# Altium PCB Силовая плата.PcbDoc (part 2 of 2)
Units mm, origin at the board's own origin, x right, y up, seen from the top; angles counter-clockwise.
Board outline 67 x 90.45 mm, 6 copper layers (F.Cu, In1.Cu, In2.Cu, In3.Cu, In4.Cu, B.Cu); 79 components, 15 nets, 212 pads, 347 vias.
Unrouted connection lines stored in the file: 1.
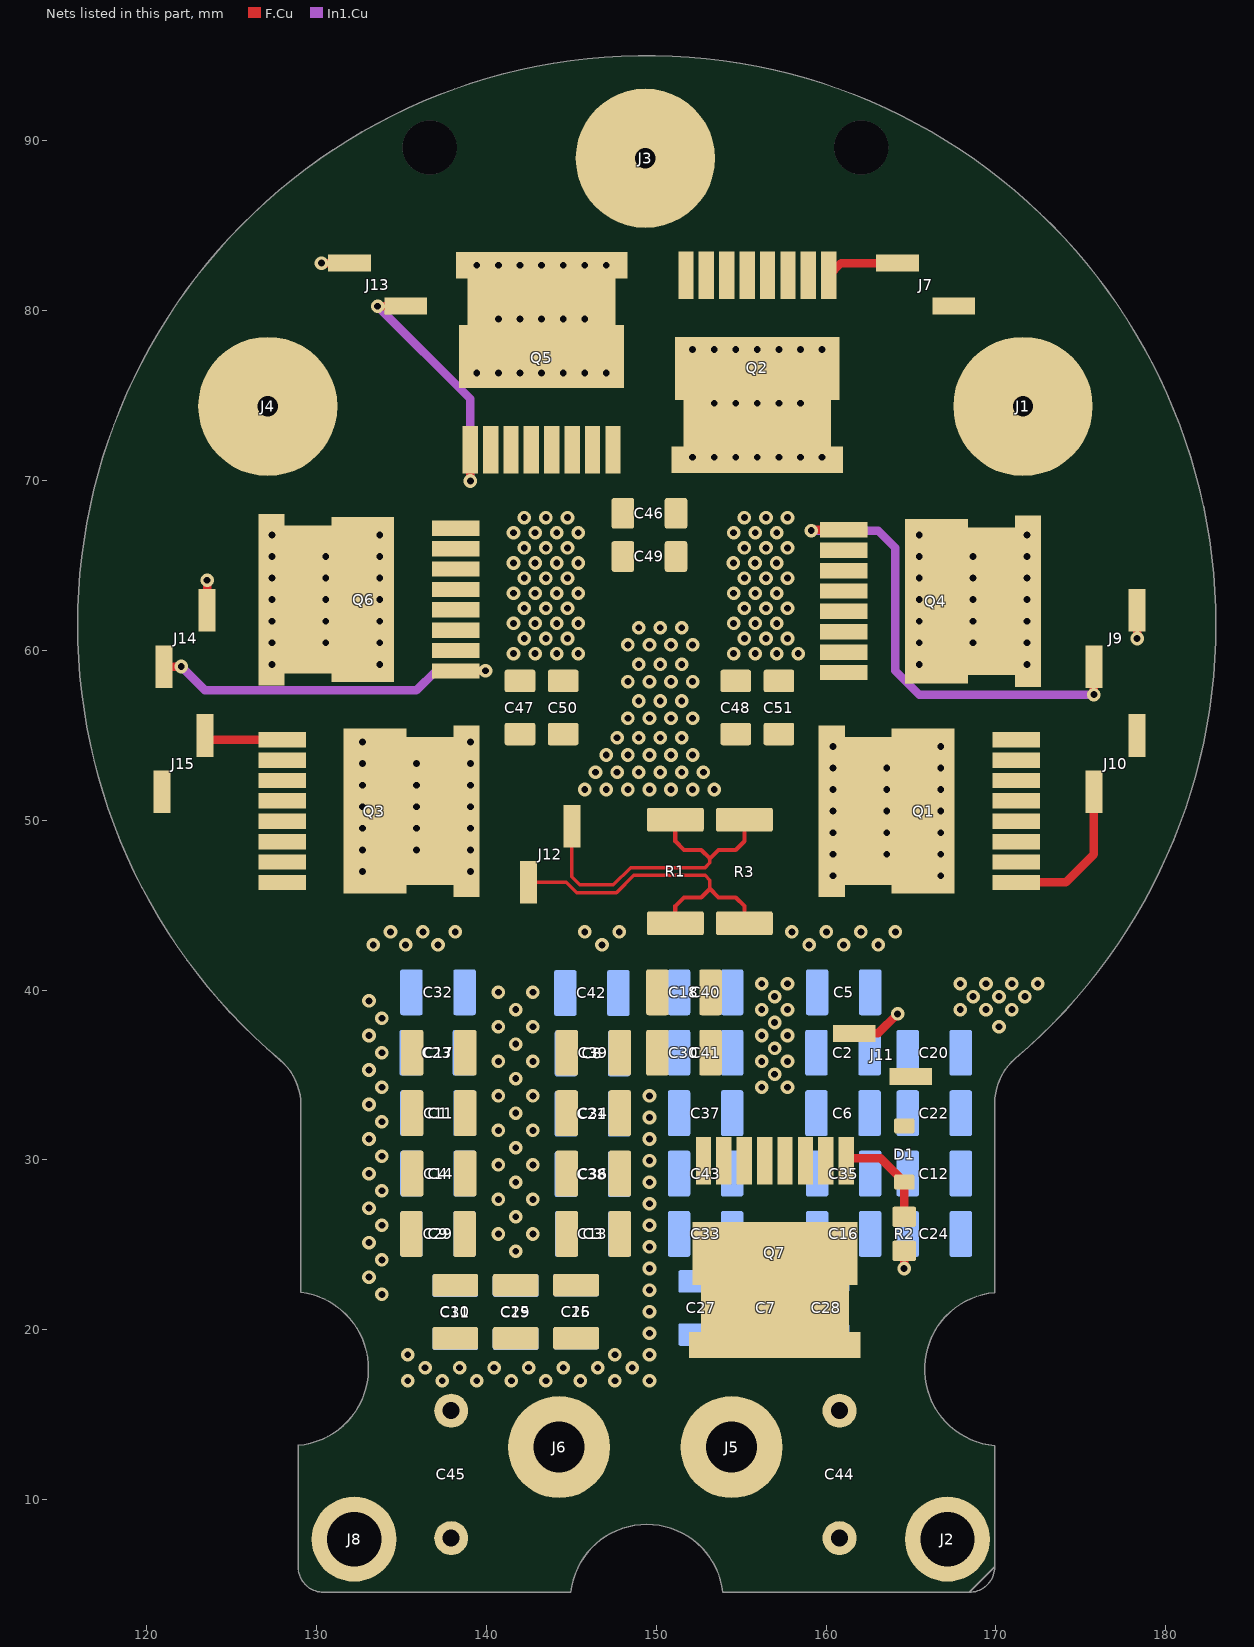
[diagram p6: the nets of this part, all layers, seen from the top]

## Via types
v1: diameter 0.8, hole 0.4, F.Cu to B.Cu, tented both sides, 347 vias

## Nets (pads, with @x,y where several pads share a name; then routed paths per layer and width w, separated by ;. In a path a pad name is that pad's centre, name@x,y a point inside that pad or via, vN(x,y) a via of type N, cw(c..) or ccw(c..) an arc to the next point about the centre after c; other vN are vias at no path point)
A: J1.1 J10.1 Q1.2 Q4.3
  other v1: 165.481,59.171 171.831,59.171 165.481,60.441 168.656,60.441 171.831,60.441 165.481,61.711 168.656,61.711 171.831,61.711 165.481,62.981 168.656,62.981 171.831,62.981 165.481,64.251 168.656,64.251 171.831,64.251 165.481,65.521 168.656,65.521 171.831,65.521 165.481,66.791 171.831,66.791
B: J3.1 J7.1 Q2.2 Q5.3
  other v1: 139.446,76.316 140.716,76.316 141.986,76.316 143.256,76.316 144.526,76.316 145.796,76.316 147.066,76.316 140.716,79.491 141.986,79.491 143.256,79.491 144.526,79.491 145.796,79.491 139.446,82.666 140.716,82.666 141.986,82.666 143.256,82.666 144.526,82.666 145.796,82.666 147.066,82.666
C: J4.1 J15.2 Q3.2 Q6.3
  other v1: 127.381,59.171 133.731,59.171 127.381,60.441 130.556,60.441 133.731,60.441 127.381,61.711 130.556,61.711 133.731,61.711 127.381,62.981 130.556,62.981 133.731,62.981 127.381,64.251 130.556,64.251 133.731,64.251 127.381,65.521 130.556,65.521 133.731,65.521 127.381,66.791 133.731,66.791
Earth_Protective: C44.1 C45.2 J2.1 J8.1
G1: J10.2 Q1.1 | length 8.9
  F.Cu w0.5: Q1.1@171.191,46.335 174.108,46.335 175.768,47.995 J10.2@175.768,51.674
G2: J9.2 Q4.1 | length 28.4
  F.Cu w0.5: v1(159.131,67.045) 159.175,67.089 Q4.1@161.036,67.089 ; v1(175.768,57.393) J9.2@175.768,59.04
  In1.Cu w0.5: v1(159.131,67.045) 163.068,67.045 164.084,66.029 164.084,58.79 165.481,57.393 v1(175.768,57.393)
G3: J7.2 Q2.1 | length 4.4
  F.Cu w0.5: Q2.1@160.156,82.063 160.885,82.793 J7.2@164.207,82.793
G4: J13.1 Q5.1 | length 16
  F.Cu w0.5: v1(133.604,80.253) J13.1@135.259,80.253 ; Q5.1@139.056,71.807 139.056,69.975 v1(139.065,69.966)
  In1.Cu w0.5: v1(133.604,80.253) 139.065,74.792 v1(139.065,69.966)
G5: J15.1 Q3.1 | length 4.6
  F.Cu w0.5: J15.1@123.444,54.984 123.693,54.735 Q3.1@127.984,54.735
G6: J14.1 Q6.1 | length 21.7
  F.Cu w0.5: J14.1@121.031,59.04 122.043,59.04 v1(122.047,59.044) ; Q6.1@138.208,58.781 139.945,58.781 v1(139.954,58.79)
  In1.Cu w0.5: v1(122.047,59.044) 123.444,57.647 135.89,57.647 137.033,58.79 v1(139.954,58.79)
GND: C1.2 C2.2 C3.2 C4.2 C5.2 C6.2 C7.2 C8.2 C9.2 C10.2 C11.2 C12.2 C13.2 C14.2 C15.2 C16.2 C17.2 C18.2 C19.2 C20.2 C21.2 C22.2 C23.2 C24.2 C25.2 C26.2 C27.2 C28.2 C29.2 C30.2 C31.2 C32.2 C33.2 C34.2 C35.2 C36.2 C37.2 C38.2 C39.2 C40.2 C41.2 C42.2 C43.2 C46.2 C47.2 C48.2 C49.2 C50.2 C51.2 D1.2 J9.1 J11.2 J13.2 J14.2 Q4.2 Q5.2 Q6.2 Q7.2 | length 5.1
  F.Cu w0.5: J14.2@123.571,62.35 v1(123.571,64.124) ; v1(130.302,82.793) J13.2@131.949,82.793 ; v1(178.308,60.695) J9.1@178.308,62.35
  other v1: 141.732,24.627 140.716,25.643 142.748,25.643 141.732,26.659 140.716,27.675 142.748,27.675 141.732,28.691 140.716,29.707 142.748,29.707 141.732,30.723 140.716,31.739 142.748,31.739 141.732,32.755 140.716,33.771 142.748,33.771 156.21,34.279 157.734,34.279 141.732,34.787 156.972,35.041 140.716,35.803 142.748,35.803 156.21,35.803 157.734,35.803 156.972,36.565 141.732,36.819 156.21,37.327 157.734,37.327 140.716,37.835 142.748,37.835 170.18,37.835 156.972,38.089 141.732,38.851 156.21,38.851 157.734,38.851 167.894,38.851 169.418,38.851 170.942,38.851 156.972,39.613 168.656,39.613 170.18,39.613 171.704,39.613 140.716,39.867 142.748,39.867 156.21,40.375 157.734,40.375 167.894,40.375 169.418,40.375 170.942,40.375 172.466,40.375 141.605,59.806 142.875,59.806 144.145,59.806 145.415,59.806 154.559,59.806 155.829,59.806 157.099,59.806 158.369,59.806 142.24,60.695 143.51,60.695 144.78,60.695 155.194,60.695 156.464,60.695 157.734,60.695 141.605,61.584 142.875,61.584 144.145,61.584 145.415,61.584 154.559,61.584 155.829,61.584 157.099,61.584 142.24,62.473 143.51,62.473 144.78,62.473 155.194,62.473 156.464,62.473 157.734,62.473 141.605,63.362 142.875,63.362 144.145,63.362 145.415,63.362 154.559,63.362 155.829,63.362 157.099,63.362 142.24,64.251 143.51,64.251 144.78,64.251 155.194,64.251 156.464,64.251 157.734,64.251 141.605,65.14 142.875,65.14 144.145,65.14 145.415,65.14 154.55,65.14 155.82,65.14 157.09,65.14 142.24,66.029 143.51,66.029 144.78,66.029 155.194,66.029 156.464,66.029 157.734,66.029 141.605,66.918 142.875,66.918 144.145,66.918 145.415,66.918 154.559,66.918 155.829,66.918 157.099,66.918 142.24,67.807 143.51,67.807 144.78,67.807 155.194,67.807 156.464,67.807 157.734,67.807
Net-(D1-K): D1.1 Q7.1 R2.1 | length 6
  F.Cu w0.5: Q7.1@161.187,30.09 163.217,30.09 D1.1@164.607,28.7 R2.1@164.607,26.65
Net-(J5-Pin_1): C44.2 J5.1 Q7.3
Shunt+: C1.1 C2.1 C3.1 C4.1 C5.1 C6.1 C7.1 C8.1 C9.1 C10.1 C11.1 C12.1 C13.1 C14.1 C15.1 C16.1 C17.1 C18.1 C19.1 C20.1 C21.1 C22.1 C23.1 C24.1 C25.1 C26.1 C27.1 C28.1 C29.1 C30.1 C31.1 C32.1 C33.1 C34.1 C35.1 C36.1 C37.1 C38.1 C39.1 C40.1 C41.1 C42.1 C43.1 C45.1 J6.1 J11.1 J12.2 R1.1 R2.2 R3.1 | length 23
  F.Cu w0.2: J12.2@142.494,46.34 144.716,46.34 145.318,45.738 147.667,45.738 148.683,46.754 152.879,46.754 153.162,46.471 153.162,45.963
  F.Cu w0.25: R1.1@151.13,43.929 151.13,44.947 151.638,45.455 152.654,45.455 153.162,45.963 153.67,45.455 154.686,45.455 155.194,44.947 R3.1@155.194,43.927
  F.Cu w0.5: J11.1@161.667,37.454 163.068,37.454 v1(164.211,38.597) ; v1(164.592,23.611) 164.607,23.626 R2.2@164.607,24.65
  other v1: 135.382,17.007 137.414,17.007 139.446,17.007 141.478,17.007 143.51,17.007 145.542,17.007 147.574,17.007 149.606,17.007 136.398,17.769 138.43,17.769 140.462,17.769 142.494,17.769 144.526,17.769 146.558,17.769 148.59,17.769 135.382,18.531 147.574,18.531 149.606,18.531 149.606,19.801 149.606,21.071 133.858,22.087 149.606,22.341 133.096,23.103 149.606,23.611 133.858,24.119 149.606,24.881 133.096,25.135 133.858,26.151 149.606,26.151 133.096,27.167 149.606,27.421 133.858,28.183 149.606,28.691 133.096,29.199 149.606,29.961 133.858,30.215 133.096,31.231 149.606,31.231 133.858,32.247 149.606,32.501 133.096,33.263 149.606,33.771 133.858,34.279 133.096,35.295 133.858,36.311 133.096,37.327 133.858,38.343 133.096,39.359 133.35,42.661 135.255,42.661 137.16,42.661 146.812,42.661 159.004,42.661 161.036,42.661 163.068,42.661 134.366,43.423 136.271,43.423 138.176,43.423 145.796,43.423 147.828,43.423 157.988,43.423 160.02,43.423 162.052,43.423 164.084,43.423
Shunt-: C46.1 C47.1 C48.1 C49.1 C50.1 C51.1 J12.1 Q1.3 Q2.3 Q3.3 R1.2 R3.2 | length 19.6
  F.Cu w0.2: J12.1@145.034,49.65 145.034,46.658 145.504,46.188 147.481,46.188 148.497,47.204 152.889,47.204 152.889,47.213 153.162,47.487 153.162,47.741
  F.Cu w0.25: R1.2@151.13,50.029 151.13,48.757 151.638,48.249 152.654,48.249 153.162,47.741 153.67,48.249 154.686,48.249 155.194,48.757 R3.2@155.194,50.027
  other v1: 160.401,46.725 166.751,46.725 132.715,46.979 139.065,46.979 160.401,47.995 163.576,47.995 166.751,47.995 132.715,48.249 135.89,48.249 139.065,48.249 160.401,49.265 163.576,49.265 166.751,49.265 132.715,49.519 135.89,49.519 139.065,49.519 160.401,50.535 163.576,50.535 166.751,50.535 132.715,50.789 135.89,50.789 139.065,50.789 145.796,51.805 147.066,51.805 148.336,51.805 149.606,51.805 150.876,51.805 152.146,51.805 153.416,51.805 160.401,51.805 163.576,51.805 166.751,51.805 132.715,52.059 135.89,52.059 139.065,52.059 146.431,52.821 147.701,52.821 148.971,52.821 150.241,52.821 151.511,52.821 152.781,52.821 160.401,53.075 163.576,53.075 166.751,53.075 132.715,53.329 135.89,53.329 139.065,53.329 147.066,53.837 148.336,53.837 149.606,53.837 150.876,53.837 152.146,53.837 160.401,54.345 166.751,54.345 132.715,54.599 139.065,54.599 147.701,54.853 148.971,54.853 150.241,54.853 151.511,54.853 148.336,55.996 149.606,55.996 150.876,55.996 152.146,55.996 148.971,57.012 150.241,57.012 151.511,57.012 148.336,58.155 149.606,58.155 150.876,58.155 152.146,58.155 148.971,59.171 150.241,59.171 151.511,59.171 148.336,60.314 149.606,60.314 150.876,60.314 152.146,60.314 148.971,61.33 150.241,61.33 151.511,61.33 152.146,71.363 153.416,71.363 154.686,71.363 155.956,71.363 157.226,71.363 158.496,71.363 159.766,71.363 153.416,74.538 154.686,74.538 155.956,74.538 157.226,74.538 158.496,74.538 152.146,77.713 153.416,77.713 154.686,77.713 155.956,77.713 157.226,77.713 158.496,77.713 159.766,77.713
pads on no net: H1.Un1 H2.Un1

## Polygon pours and split planes (outlines as drawn)
Shunt+ on F.Cu "F.Cu-Shunt+-2" (solid, remove dead copper, pour order 38): 135.398,44.439 cw(c135.398,43.439) 136.398,43.439 136.398,24.5 cw(c136.271,24.5) 136.271,24.373 ccw(c136.271,24.246) 136.144,24.246 136.144,21.055 ccw(c137.144,21.055) 137.144,20.055 146.32,20.055 ccw(c146.32,21.055) 147.32,21.055 147.32,24.373 ccw(c148.32,24.373) 147.32,24.373 147.32,40.899 cw(c148.32,40.899) 148.32,41.899 149.622,41.899 cw(c149.622,40.899) 150.622,40.899 150.622,13.943 cw(c149.622,13.943) 149.622,12.943 117.078,12.943 cw(c117.078,13.943) 116.078,13.943 116.078,43.439 cw(c117.078,43.439) 117.078,44.439
Earth_Protective on F.Cu "F.Cu-Earth_Protective-1" (solid, remove dead copper, pour order 78): 159.908,4.63 159.908,9.964 170.068,9.964 170.068,4.63
GND on F.Cu "F.Cu-GND-6" (solid, remove dead copper, pour order 54): 145.812,57.266 ccw(c145.812,58.266) 146.812,58.266 146.812,63.378 cw(c147.812,63.378) 147.812,64.378 147.844,64.378 ccw(c147.844,65.378) 148.844,65.378 148.844,68.886 ccw(c148.399,68.886) 148.399,69.331 cw(c148.399,69.775) 147.955,69.775 147.955,72.395 ccw(c146.955,72.395) 146.955,73.395 139.557,73.395 ccw(c139.557,72.395) 138.557,72.395 138.557,68.823 cw(c137.668,68.823) 137.668,67.934 ccw(c137.668,67.045) 136.779,67.045 136.779,58.266 ccw(c137.779,58.266) 137.779,57.266
GND on F.Cu "F.Cu-GND-5" (solid, remove dead copper, pour order 92): 138.668,41.137 ccw(c138.668,40.137) 137.668,40.137 137.668,23.738 cw(c137.287,23.738) 137.287,23.357 ccw(c137.287,22.976) 136.906,22.976 136.906,22.722 ccw(c137.541,22.722) 137.541,22.087 145.923,22.087 ccw(c145.923,22.722) 146.558,22.722 ccw(c145.923,22.722) 145.923,23.357 cw(c145.923,23.992) 145.288,23.992 145.288,40.137 ccw(c144.288,40.137) 144.288,41.137
Shunt- on F.Cu "F.Cu-Shunt--4" (solid, remove dead copper, pour order 50): 156.226,49.519 cw(c156.226,48.519) 157.226,48.519 157.226,46.328 ccw(c158.226,46.328) 158.226,45.328 166.767,45.328 ccw(c166.767,46.328) 167.767,46.328 167.767,54.869 ccw(c166.767,54.869) 166.767,55.869 153.908,55.869 cw(c153.908,56.869) 152.908,56.869 152.908,69.093 cw(c153.908,69.093) 153.908,70.093 160.417,70.093 ccw(c160.417,71.093) 161.417,71.093 161.417,77.602 ccw(c160.417,77.602) 160.417,78.602 151.876,78.602 ccw(c151.876,77.602) 150.876,77.602 150.876,64.489 cw(c149.876,64.489) 149.876,63.489 148.701,63.489 ccw(c148.701,62.489) 147.701,62.489 147.701,56.742 cw(c146.701,56.742) 146.701,55.742 132.445,55.742 ccw(c132.445,54.742) 131.445,54.742 131.445,46.328 ccw(c132.445,46.328) 132.445,45.328 139.589,45.328 ccw(c139.589,46.328) 140.589,46.328 140.589,48.519 cw(c141.589,48.519) 141.589,49.519
Shunt+ on F.Cu "F.Cu-Shunt+-1" (solid, remove dead copper, pour order 44): 136.398,43.439 cw(c137.398,43.439) 137.398,44.439 152.162,44.439 cw(c152.162,43.439) 153.162,43.439 153.162,42.899 cw(c152.162,42.899) 152.162,41.899 150.622,41.899 ccw(c150.622,42.899) 150.622,41.899 147.32,41.899 ccw(c147.32,42.899) 147.32,41.899 137.398,41.899 cw(c137.398,42.899) 136.398,42.899
GND on F.Cu "F.Cu-GND-4" (solid, remove dead copper, pour order 52): 153.797,58.266 ccw(c154.797,58.266) 154.797,57.266 161.56,57.266 ccw(c161.56,58.266) 162.56,58.266 162.56,68.331 ccw(c161.56,68.331) 161.56,69.331 154.797,69.331 ccw(c154.797,68.331) 153.797,68.331
Earth_Protective on F.Cu "F.Cu-Earth_Protective" (solid, remove dead copper, pour order 58): 128.92,9.964 138.826,9.964 138.826,4.63 128.92,4.63
A on F.Cu "F.Cu-A" (solid, remove dead copper, pour order 70): 182.134,47.106 ccw(c182.134,48.106) 183.134,48.106 183.134,77.475 ccw(c182.134,77.475) 182.134,78.475 163.433,78.475 ccw(c163.433,77.475) 162.433,77.475 162.433,71.093 ccw(c163.433,71.093) 163.433,70.093 163.592,70.093 cw(c163.592,69.093) 164.592,69.093 164.592,58.266 ccw(c165.592,58.266) 165.592,57.266 168.799,57.266 cw(c168.799,56.266) 169.799,56.266 169.799,48.106 ccw(c170.799,48.106) 170.799,47.106
C on F.Cu "F.Cu-C" (solid, remove dead copper, pour order 69): 117.078,45.582 cw(c117.078,46.582) 116.078,46.582 116.078,77.475 cw(c117.078,77.475) 117.078,78.475 135.779,78.475 cw(c135.779,77.475) 136.779,77.475 136.779,71.093 cw(c135.779,71.093) 135.779,70.093 135.62,70.093 ccw(c135.62,69.093) 134.62,69.093 134.62,58.266 cw(c133.62,58.266) 133.62,57.266 130.413,57.266 ccw(c130.413,56.266) 129.413,56.266 129.413,46.582 cw(c128.413,46.582) 128.413,45.582
B on F.Cu "F.Cu-B" (solid, remove dead copper, pour order 74): 149.241,75.427 ccw(c149.241,76.427) 150.241,76.427 150.241,78.237 cw(c151.241,78.237) 151.241,79.237 182.134,79.237 ccw(c182.134,80.237) 183.134,80.237 183.134,93.985 ccw(c182.134,93.985) 182.134,94.985 117.078,94.985 ccw(c117.078,93.985) 116.078,93.985 116.078,80.237 ccw(c117.078,80.237) 117.078,79.237 136.541,79.237 cw(c136.541,78.237) 137.541,78.237 137.541,76.427 ccw(c138.541,76.427) 138.541,75.427
Shunt- on F.Cu "F.Cu-Shunt--3" (solid, remove dead copper, pour order 62): 150.876,70.839 ccw(c151.876,70.839) 151.876,69.839 152.781,69.839 ccw(c152.781,69.966) 152.908,69.966 cw(c153.035,69.966) 153.035,70.093 160.417,70.093 ccw(c160.417,71.093) 161.417,71.093 161.417,77.602 ccw(c160.417,77.602) 160.417,78.602 151.876,78.602 ccw(c151.876,77.602) 150.876,77.602
Shunt- on F.Cu "F.Cu-Shunt--2" (solid, remove dead copper, pour order 61): 140.589,54.742 ccw(c139.589,54.742) 139.589,55.742 132.445,55.742 ccw(c132.445,54.742) 131.445,54.742 131.445,46.582 ccw(c132.445,46.582) 132.445,45.582 139.589,45.582 ccw(c139.589,46.582) 140.589,46.582
Shunt- on F.Cu "F.Cu-Shunt--1" (solid, remove dead copper, pour order 59): 149.669,49.519 cw(c149.669,50.471) 148.717,50.471 cw(c149.669,50.471) 149.669,51.424 156.273,51.424 cw(c156.273,50.471) 157.226,50.471 cw(c156.273,50.471) 156.273,49.519
GND on F.Cu "F.Cu-GND-3" (solid, remove dead copper, pour order 39): 168.005,44.439 ccw(c168.005,43.439) 167.005,43.439 167.005,42.137 cw(c166.005,42.137) 166.005,41.137 154.035,41.137 ccw(c154.035,40.137) 153.035,40.137 153.035,32.628 cw(c152.908,32.628) 152.908,32.501 ccw(c152.908,32.374) 152.781,32.374 152.781,30.961 ccw(c153.781,30.961) 153.781,29.961 182.134,29.961 ccw(c182.134,30.961) 183.134,30.961 183.134,43.439 ccw(c182.134,43.439) 182.134,44.439
Net-(J5-Pin_1) on F.Cu "F.Cu-Net-(J5-Pin_1)" (solid, remove dead copper, pour order 40): 152.4,13.943 ccw(c153.4,13.943) 153.4,12.943 182.134,12.943 ccw(c182.134,13.943) 183.134,13.943 183.134,26.421 ccw(c182.134,26.421) 182.134,27.421 153.4,27.421 ccw(c153.4,26.421) 152.4,26.421
GND on F.Cu "F.Cu-GND-2" (solid, remove dead copper, pour order 91): 139.827,72.395 cw(c140.827,72.395) 140.827,73.395 146.955,73.395 cw(c146.955,72.395) 147.955,72.395 147.955,70.712 cw(c146.955,70.712) 146.955,69.712 140.827,69.712 cw(c140.827,70.712) 139.827,70.712
Shunt- on F.Cu "F.Cu-Shunt-" (solid, remove dead copper, pour order 60): 158.877,54.869 cw(c159.877,54.869) 159.877,55.869 166.767,55.869 cw(c166.767,54.869) 167.767,54.869 167.767,46.328 cw(c166.767,46.328) 166.767,45.328 159.877,45.328 cw(c159.877,46.328) 158.877,46.328
Shunt+ on F.Cu "F.Cu-Shunt+" (solid, remove dead copper, pour order 47): 153.162,43.439 cw(c154.162,43.439) 154.162,44.439 164.354,44.439 cw(c164.354,43.439) 165.354,43.439 165.354,42.899 cw(c164.354,42.899) 164.354,41.899 154.162,41.899 cw(c154.162,42.899) 153.162,42.899
GND on F.Cu "F.Cu-GND-1" (solid, remove dead copper, pour order 55): 136.779,67.045 cw(c137.668,67.045) 137.668,67.934 138.43,67.934 ccw(c138.43,68.061) 138.557,68.061 cw(c138.684,68.061) 138.684,68.188 139.382,68.188 cw(c139.382,67.362) 140.208,67.362 140.208,60.425 cw(c139.208,60.425) 139.208,59.425 137.779,59.425 cw(c137.779,60.425) 136.779,60.425
GND on F.Cu "F.Cu-GND" (solid, remove dead copper, pour order 56): 162.56,65.41 ccw(c161.56,65.41) 161.56,66.41 160.004,66.41 ccw(c160.004,65.41) 159.004,65.41 159.004,58.266 ccw(c160.004,58.266) 160.004,57.266 161.56,57.266 ccw(c161.56,58.266) 162.56,58.266
B on In3.Cu "In3.Cu-B-1" (solid, remove dead copper, pour order 85): 137.541,67.537 ccw(c138.541,67.537) 138.541,66.537 160.544,66.537 ccw(c160.544,67.537) 161.544,67.537 161.544,78.237 ccw(c160.544,78.237) 160.544,79.237 138.541,79.237 ccw(c138.541,78.237) 137.541,78.237
Shunt- on In3.Cu "In3.Cu-Shunt-" (solid, remove dead copper, pour order 89): 137.795,64.902 cw(c138.795,64.902) 138.795,65.902 160.29,65.902 cw(c160.29,64.902) 161.29,64.902 161.29,46.582 cw(c160.29,46.582) 160.29,45.582 138.795,45.582 cw(c138.795,46.582) 137.795,46.582
A on In3.Cu "In3.Cu-A-1" (solid, remove dead copper, pour order 83): 163.433,70.093 ccw(c163.433,69.093) 162.433,69.093 162.433,48.106 ccw(c163.433,48.106) 163.433,47.106 168.799,47.106 ccw(c168.799,48.106) 169.799,48.106 169.799,69.093 ccw(c168.799,69.093) 168.799,70.093
C on In3.Cu "In3.Cu-C-1" (solid, remove dead copper, pour order 81): 135.779,70.093 cw(c135.779,69.093) 136.779,69.093 136.779,48.106 cw(c135.779,48.106) 135.779,47.106 130.413,47.106 cw(c130.413,48.106) 129.413,48.106 129.413,69.093 cw(c130.413,69.093) 130.413,70.093
GND on In3.Cu "In3.Cu-GND" (solid, remove dead copper, pour order 90): 116.078,13.943 ccw(c117.078,13.943) 117.078,12.943 182.134,12.943 ccw(c182.134,13.943) 183.134,13.943 183.134,43.439 ccw(c182.134,43.439) 182.134,44.439 117.078,44.439 ccw(c117.078,43.439) 116.078,43.439
A on In3.Cu "In3.Cu-A" (solid, remove dead copper, pour order 68): 182.134,47.106 ccw(c182.134,48.106) 183.134,48.106 183.134,77.475 ccw(c182.134,77.475) 182.134,78.475 163.433,78.475 ccw(c163.433,77.475) 162.433,77.475 162.433,71.093 ccw(c163.433,71.093) 163.433,70.093 163.592,70.093 cw(c163.592,69.093) 164.592,69.093 164.592,58.266 ccw(c165.592,58.266) 165.592,57.266 168.799,57.266 cw(c168.799,56.266) 169.799,56.266 169.799,48.106 ccw(c170.799,48.106) 170.799,47.106
C on In3.Cu "In3.Cu-C" (solid, remove dead copper, pour order 67): 117.078,45.582 cw(c117.078,46.582) 116.078,46.582 116.078,77.475 cw(c117.078,77.475) 117.078,78.475 135.779,78.475 cw(c135.779,77.475) 136.779,77.475 136.779,71.093 cw(c135.779,71.093) 135.779,70.093 135.62,70.093 ccw(c135.62,69.093) 134.62,69.093 134.62,58.266 cw(c133.62,58.266) 133.62,57.266 130.413,57.266 ccw(c130.413,56.266) 129.413,56.266 129.413,46.582 cw(c128.413,46.582) 128.413,45.582
B on In3.Cu "In3.Cu-B" (solid, remove dead copper, pour order 73): 149.241,75.427 ccw(c149.241,76.427) 150.241,76.427 150.241,78.237 cw(c151.241,78.237) 151.241,79.237 182.134,79.237 ccw(c182.134,80.237) 183.134,80.237 183.134,93.985 ccw(c182.134,93.985) 182.134,94.985 117.078,94.985 ccw(c117.078,93.985) 116.078,93.985 116.078,80.237 ccw(c117.078,80.237) 117.078,79.237 136.541,79.237 cw(c136.541,78.237) 137.541,78.237 137.541,76.427 ccw(c138.541,76.427) 138.541,75.427
Shunt+ on In4.Cu "In4.Cu-Shunt+" (solid, remove dead copper, pour order 87): 116.078,43.439 cw(c117.078,43.439) 117.078,44.439 182.134,44.439 cw(c182.134,43.439) 183.134,43.439 183.134,13.943 cw(c182.134,13.943) 182.134,12.943 117.078,12.943 cw(c117.078,13.943) 116.078,13.943
B on In4.Cu "In4.Cu-B-1" (solid, remove dead copper, pour order 84): 137.541,67.537 ccw(c138.541,67.537) 138.541,66.537 160.544,66.537 ccw(c160.544,67.537) 161.544,67.537 161.544,78.237 ccw(c160.544,78.237) 160.544,79.237 138.541,79.237 ccw(c138.541,78.237) 137.541,78.237
Shunt- on In4.Cu "In4.Cu-Shunt-" (solid, remove dead copper, pour order 88): 137.795,64.902 cw(c138.795,64.902) 138.795,65.902 160.29,65.902 cw(c160.29,64.902) 161.29,64.902 161.29,46.582 cw(c160.29,46.582) 160.29,45.582 138.795,45.582 cw(c138.795,46.582) 137.795,46.582
A on In4.Cu "In4.Cu-A-1" (solid, remove dead copper, pour order 82): 163.433,70.093 ccw(c163.433,69.093) 162.433,69.093 162.433,48.106 ccw(c163.433,48.106) 163.433,47.106 168.799,47.106 ccw(c168.799,48.106) 169.799,48.106 169.799,69.093 ccw(c168.799,69.093) 168.799,70.093
C on In4.Cu "In4.Cu-C-1" (solid, remove dead copper, pour order 80): 135.779,70.093 cw(c135.779,69.093) 136.779,69.093 136.779,48.106 cw(c135.779,48.106) 135.779,47.106 130.413,47.106 cw(c130.413,48.106) 129.413,48.106 129.413,69.093 cw(c130.413,69.093) 130.413,70.093
A on In4.Cu "In4.Cu-A" (solid, remove dead copper, pour order 66): 182.134,47.106 ccw(c182.134,48.106) 183.134,48.106 183.134,77.475 ccw(c182.134,77.475) 182.134,78.475 163.433,78.475 ccw(c163.433,77.475) 162.433,77.475 162.433,71.093 ccw(c163.433,71.093) 163.433,70.093 163.592,70.093 cw(c163.592,69.093) 164.592,69.093 164.592,58.266 ccw(c165.592,58.266) 165.592,57.266 168.799,57.266 cw(c168.799,56.266) 169.799,56.266 169.799,48.106 ccw(c170.799,48.106) 170.799,47.106
C on In4.Cu "In4.Cu-C" (solid, remove dead copper, pour order 65): 117.078,45.582 cw(c117.078,46.582) 116.078,46.582 116.078,77.475 cw(c117.078,77.475) 117.078,78.475 135.779,78.475 cw(c135.779,77.475) 136.779,77.475 136.779,71.093 cw(c135.779,71.093) 135.779,70.093 135.62,70.093 ccw(c135.62,69.093) 134.62,69.093 134.62,58.266 cw(c133.62,58.266) 133.62,57.266 130.413,57.266 ccw(c130.413,56.266) 129.413,56.266 129.413,46.582 cw(c128.413,46.582) 128.413,45.582
B on In4.Cu "In4.Cu-B" (solid, remove dead copper, pour order 72): 149.241,75.427 ccw(c149.241,76.427) 150.241,76.427 150.241,78.237 cw(c151.241,78.237) 151.241,79.237 182.134,79.237 ccw(c182.134,80.237) 183.134,80.237 183.134,93.985 ccw(c182.134,93.985) 182.134,94.985 117.078,94.985 ccw(c117.078,93.985) 116.078,93.985 116.078,80.237 ccw(c117.078,80.237) 117.078,79.237 136.541,79.237 cw(c136.541,78.237) 137.541,78.237 137.541,76.427 ccw(c138.541,76.427) 138.541,75.427
Shunt- on B.Cu "B.Cu-Shunt--1" (solid, remove dead copper, pour order 86): 140.589,46.328 ccw(c141.589,46.328) 141.589,45.328 156.226,45.328 ccw(c156.226,46.328) 157.226,46.328 157.226,48.519 ccw(c156.226,48.519) 156.226,49.519 141.589,49.519 ccw(c141.589,48.519) 140.589,48.519
GND on B.Cu "B.Cu-GND-4" (solid, remove dead copper, pour order 41): 154.924,41.137 ccw(c154.924,40.137) 153.924,40.137 153.924,24.357 cw(c152.924,24.357) 152.924,23.357 151.892,23.357 ccw(c151.892,22.849) 151.384,22.849 ccw(c151.892,22.849) 151.892,22.341 160.782,22.341 ccw(c160.782,22.849) 161.29,22.849 ccw(c160.782,22.849) 160.782,23.357 160.655,23.357 cw(c160.655,23.992) 160.02,23.992 160.02,40.137 ccw(c159.02,40.137) 159.02,41.137
Shunt+ on B.Cu "B.Cu-Shunt+-4" (solid, remove dead copper, pour order 45): 151.384,41.899 cw(c151.384,41.137) 152.146,41.137 152.146,25.135 cw(c151.384,25.135) 151.384,24.373 cw(c151.384,25.135) 150.622,25.135 150.622,41.137 cw(c151.384,41.137)
Shunt+ on B.Cu "B.Cu-Shunt+-3" (solid, remove dead copper, pour order 46): 153.162,43.439 cw(c154.162,43.439) 154.162,44.439 164.354,44.439 cw(c164.354,43.439) 165.354,43.439 165.354,42.137 cw(c164.354,42.137) 164.354,41.137 162.433,41.137 cw(c162.433,41.518) 162.052,41.518 ccw(c161.671,41.518) 161.671,41.899 154.162,41.899 cw(c154.162,42.899) 153.162,42.899
GND on B.Cu "B.Cu-GND-3" (solid, remove dead copper, pour order 48): 167.501,12.943 cw(c167.501,13.943) 166.501,13.947 166.62,43.443 cw(c167.62,43.439) 167.62,44.439 182.134,44.439 cw(c182.134,43.439) 183.134,43.439 183.134,13.943 cw(c182.134,13.943) 182.134,12.943
Shunt+ on B.Cu "B.Cu-Shunt+-2" (solid, remove dead copper, pour order 42): 150.622,19.309 cw(c151.622,19.309) 151.622,20.309 161.306,20.309 ccw(c161.306,21.309) 162.306,21.309 162.306,24.246 ccw(c162.179,24.246) 162.179,24.373 cw(c162.179,24.5) 162.052,24.5 162.052,40.137 cw(c163.052,40.137) 163.052,41.137 164.354,41.137 cw(c164.354,40.137) 165.354,40.137 165.354,35.549 cw(c166.354,35.549) 165.354,35.549 165.354,13.943 cw(c164.354,13.943) 164.354,12.943 151.622,12.943 cw(c151.622,13.943) 150.622,13.943
Shunt+ on B.Cu "B.Cu-Shunt+-1" (solid, remove dead copper, pour order 37): 135.398,44.439 cw(c135.398,43.439) 136.398,43.439 136.398,24.5 cw(c136.271,24.5) 136.271,24.373 ccw(c136.271,24.246) 136.144,24.246 136.144,21.055 ccw(c137.144,21.055) 137.144,20.055 146.32,20.055 ccw(c146.32,21.055) 147.32,21.055 147.32,24.373 ccw(c148.32,24.373) 147.32,24.373 147.32,40.899 cw(c148.32,40.899) 148.32,41.899 149.622,41.899 cw(c149.622,40.899) 150.622,40.899 150.622,13.943 cw(c149.622,13.943) 149.622,12.943 117.078,12.943 cw(c117.078,13.943) 116.078,13.943 116.078,43.439 cw(c117.078,43.439) 117.078,44.439
Earth_Protective on B.Cu "B.Cu-Earth_Protective-1" (solid, remove dead copper, pour order 77): 159.908,4.63 159.908,9.964 170.068,9.964 170.068,4.63
GND on B.Cu "B.Cu-GND-2" (solid, remove dead copper, pour order 53): 145.812,57.266 ccw(c145.812,58.266) 146.812,58.266 146.812,63.378 cw(c147.812,63.378) 147.812,64.378 147.844,64.378 ccw(c147.844,65.378) 148.844,65.378 148.844,68.886 ccw(c148.399,68.886) 148.399,69.331 cw(c148.399,69.775) 147.955,69.775 147.955,72.395 ccw(c146.955,72.395) 146.955,73.395 139.557,73.395 ccw(c139.557,72.395) 138.557,72.395 138.557,68.823 cw(c137.668,68.823) 137.668,67.934 ccw(c137.668,67.045) 136.779,67.045 136.779,58.266 ccw(c137.779,58.266) 137.779,57.266
GND on B.Cu "B.Cu-GND-1" (solid, remove dead copper, pour order 93): 138.668,41.137 ccw(c138.668,40.137) 137.668,40.137 137.668,23.738 cw(c137.287,23.738) 137.287,23.357 ccw(c137.287,22.976) 136.906,22.976 136.906,22.722 ccw(c137.541,22.722) 137.541,22.087 145.923,22.087 ccw(c145.923,22.722) 146.558,22.722 ccw(c145.923,22.722) 145.923,23.357 cw(c145.923,23.992) 145.288,23.992 145.288,40.137 ccw(c144.288,40.137) 144.288,41.137
Shunt- on B.Cu "B.Cu-Shunt-" (solid, remove dead copper, pour order 49): 156.226,49.519 cw(c156.226,48.519) 157.226,48.519 157.226,46.328 ccw(c158.226,46.328) 158.226,45.328 166.767,45.328 ccw(c166.767,46.328) 167.767,46.328 167.767,54.869 ccw(c166.767,54.869) 166.767,55.869 153.908,55.869 cw(c153.908,56.869) 152.908,56.869 152.908,69.093 cw(c153.908,69.093) 153.908,70.093 160.417,70.093 ccw(c160.417,71.093) 161.417,71.093 161.417,77.602 ccw(c160.417,77.602) 160.417,78.602 151.876,78.602 ccw(c151.876,77.602) 150.876,77.602 150.876,64.489 cw(c149.876,64.489) 149.876,63.489 148.701,63.489 ccw(c148.701,62.489) 147.701,62.489 147.701,56.742 cw(c146.701,56.742) 146.701,55.742 132.445,55.742 ccw(c132.445,54.742) 131.445,54.742 131.445,46.328 ccw(c132.445,46.328) 132.445,45.328 139.589,45.328 ccw(c139.589,46.328) 140.589,46.328 140.589,48.519 cw(c141.589,48.519) 141.589,49.519
Shunt+ on B.Cu "B.Cu-Shunt+" (solid, remove dead copper, pour order 43): 136.398,43.439 cw(c137.398,43.439) 137.398,44.439 152.162,44.439 cw(c152.162,43.439) 153.162,43.439 153.162,42.899 cw(c152.162,42.899) 152.162,41.899 150.622,41.899 ccw(c150.622,42.899) 150.622,41.899 147.32,41.899 ccw(c147.32,42.899) 147.32,41.899 137.398,41.899 cw(c137.398,42.899) 136.398,42.899
GND on B.Cu "B.Cu-GND" (solid, remove dead copper, pour order 51): 153.797,58.266 ccw(c154.797,58.266) 154.797,57.266 161.56,57.266 ccw(c161.56,58.266) 162.56,58.266 162.56,68.331 ccw(c161.56,68.331) 161.56,69.331 154.797,69.331 ccw(c154.797,68.331) 153.797,68.331
Earth_Protective on B.Cu "B.Cu-Earth_Protective" (solid, remove dead copper, pour order 57): 128.92,9.964 138.826,9.964 138.826,4.63 128.92,4.63
A on B.Cu "B.Cu-A" (solid, remove dead copper, pour order 64): 182.134,47.106 ccw(c182.134,48.106) 183.134,48.106 183.134,77.475 ccw(c182.134,77.475) 182.134,78.475 163.433,78.475 ccw(c163.433,77.475) 162.433,77.475 162.433,71.093 ccw(c163.433,71.093) 163.433,70.093 163.592,70.093 cw(c163.592,69.093) 164.592,69.093 164.592,58.266 ccw(c165.592,58.266) 165.592,57.266 168.799,57.266 cw(c168.799,56.266) 169.799,56.266 169.799,48.106 ccw(c170.799,48.106) 170.799,47.106
C on B.Cu "B.Cu-C" (solid, remove dead copper, pour order 63): 117.078,45.582 cw(c117.078,46.582) 116.078,46.582 116.078,77.475 cw(c117.078,77.475) 117.078,78.475 135.779,78.475 cw(c135.779,77.475) 136.779,77.475 136.779,71.093 cw(c135.779,71.093) 135.779,70.093 135.62,70.093 ccw(c135.62,69.093) 134.62,69.093 134.62,58.266 cw(c133.62,58.266) 133.62,57.266 130.413,57.266 ccw(c130.413,56.266) 129.413,56.266 129.413,46.582 cw(c128.413,46.582) 128.413,45.582
B on B.Cu "B.Cu-B" (solid, remove dead copper, pour order 71): 149.241,75.427 ccw(c149.241,76.427) 150.241,76.427 150.241,78.237 cw(c151.241,78.237) 151.241,79.237 182.134,79.237 ccw(c182.134,80.237) 183.134,80.237 183.134,93.985 ccw(c182.134,93.985) 182.134,94.985 117.078,94.985 ccw(c117.078,93.985) 116.078,93.985 116.078,80.237 ccw(c117.078,80.237) 117.078,79.237 136.541,79.237 cw(c136.541,78.237) 137.541,78.237 137.541,76.427 ccw(c138.541,76.427) 138.541,75.427
GND on In1.Cu "In1.Cu-GND" (solid, remove dead copper, pour order 75): 182.134,23.357 ccw(c182.134,24.357) 183.134,24.357 183.134,93.985 ccw(c182.134,93.985) 182.134,94.985 117.078,94.985 ccw(c117.078,93.985) 116.078,93.985 116.078,24.357 ccw(c117.078,24.357) 117.078,23.357
Shunt- on In2.Cu "In2.Cu-Shunt-" (solid, remove dead copper, pour order 79): 116.078,46.582 ccw(c117.078,46.582) 117.078,45.582 182.134,45.582 ccw(c182.134,46.582) 183.134,46.582 183.134,93.985 ccw(c182.134,93.985) 182.134,94.985 117.078,94.985 ccw(c117.078,93.985) 116.078,93.985
Shunt+ on In2.Cu "In2.Cu-Shunt+" (solid, remove dead copper, pour order 76): 116.078,13.943 ccw(c117.078,13.943) 117.078,12.943 182.134,12.943 ccw(c182.134,13.943) 183.134,13.943 183.134,43.439 ccw(c182.134,43.439) 182.134,44.439 117.078,44.439 ccw(c117.078,43.439) 116.078,43.439

## Keep-outs
F.Cu:
  region: 145.796,48.122 144.272,48.122 144.272,51.17 145.796,51.17
Edge.Cuts:
  lines w0: 168.428,4.55 ccw(c168.428,6.05) 169.928,6.05 ; 168.428,4.55 ccw(c168.428,6.05) 169.928,6.05 ; 168.428,4.55 169.928,6.05 ; 168.428,4.55 153.922,4.552 ccw(c149.451,4.05) 144.979,4.553 130.428,4.55 cw(c130.428,6.05) 128.928,6.05 128.928,13.203 ccw(c128.543,17.71) 129.09,22.201 129.09,33.22 ccw(c125.585,33.222) 127.848,35.898 cw(c149.45,61.502) 115.951,61.502 cw(c149.451,61.502) 182.951,61.502 cw(c149.45,61.502) 171.159,35.988 ccw(c173.428,33.322) 169.927,33.322 169.927,22.185 ccw(c170.317,17.686) 169.927,13.187 169.928,6.05
  lines w0.254: 168.428,4.55 ccw(c168.428,6.05) 169.928,6.05 ; 168.428,4.55 ccw(c168.428,6.05) 169.928,6.05 ; 168.428,4.55 153.922,4.552 ccw(c149.451,4.05) 144.979,4.553 130.428,4.55 cw(c130.428,6.05) 128.928,6.05 128.928,13.203 ccw(c128.543,17.71) 129.09,22.201 129.09,33.22 ccw(c125.585,33.222) 127.848,35.898 cw(c149.45,61.502) 115.951,61.502 cw(c149.451,61.502) 182.951,61.502 cw(c149.45,61.502) 171.159,35.988 ccw(c173.428,33.322) 169.927,33.322 169.927,22.185 ccw(c170.317,17.686) 169.927,13.187 169.928,6.05

## Silkscreen, mask and mechanical layers (free items; w line width, h text height)
Dwgs.User:
  drawing of 193 lines, arcs and shapes, not listed